# Altium PCB TH PCB.PcbDoc
Units mm, origin at the board's own origin, x right, y up, seen from the top; angles counter-clockwise.
Board outline 108.58 x 105.54 mm, 2 copper layers (Top Layer, Bottom Layer); 35 components, 24 nets, 87 pads, 0 vias.
Unrouted connection lines stored in the file: 28.
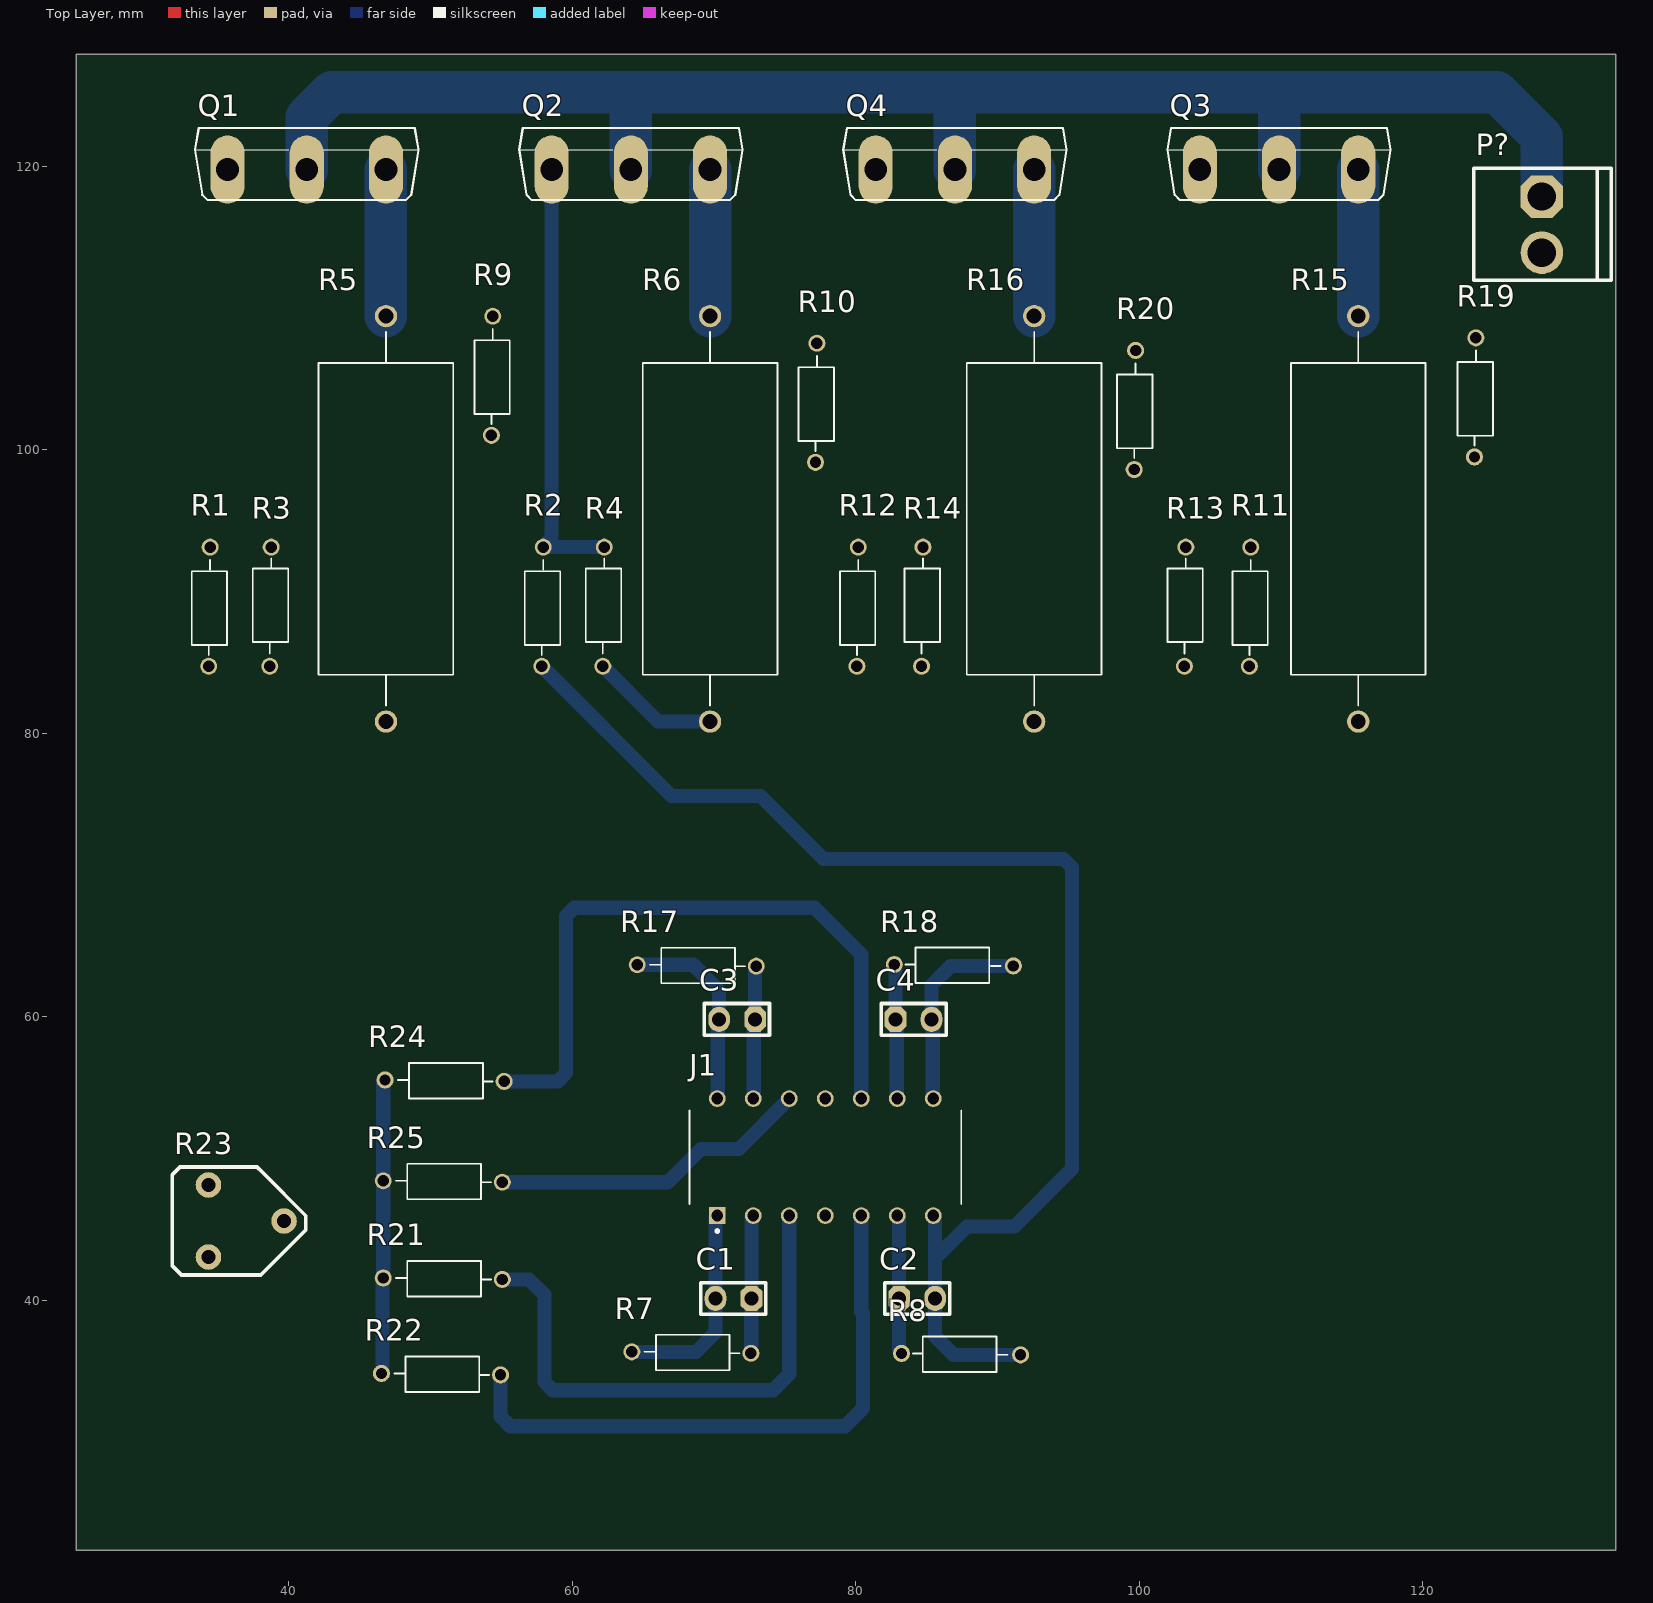
[diagram p0: Top Layer view]
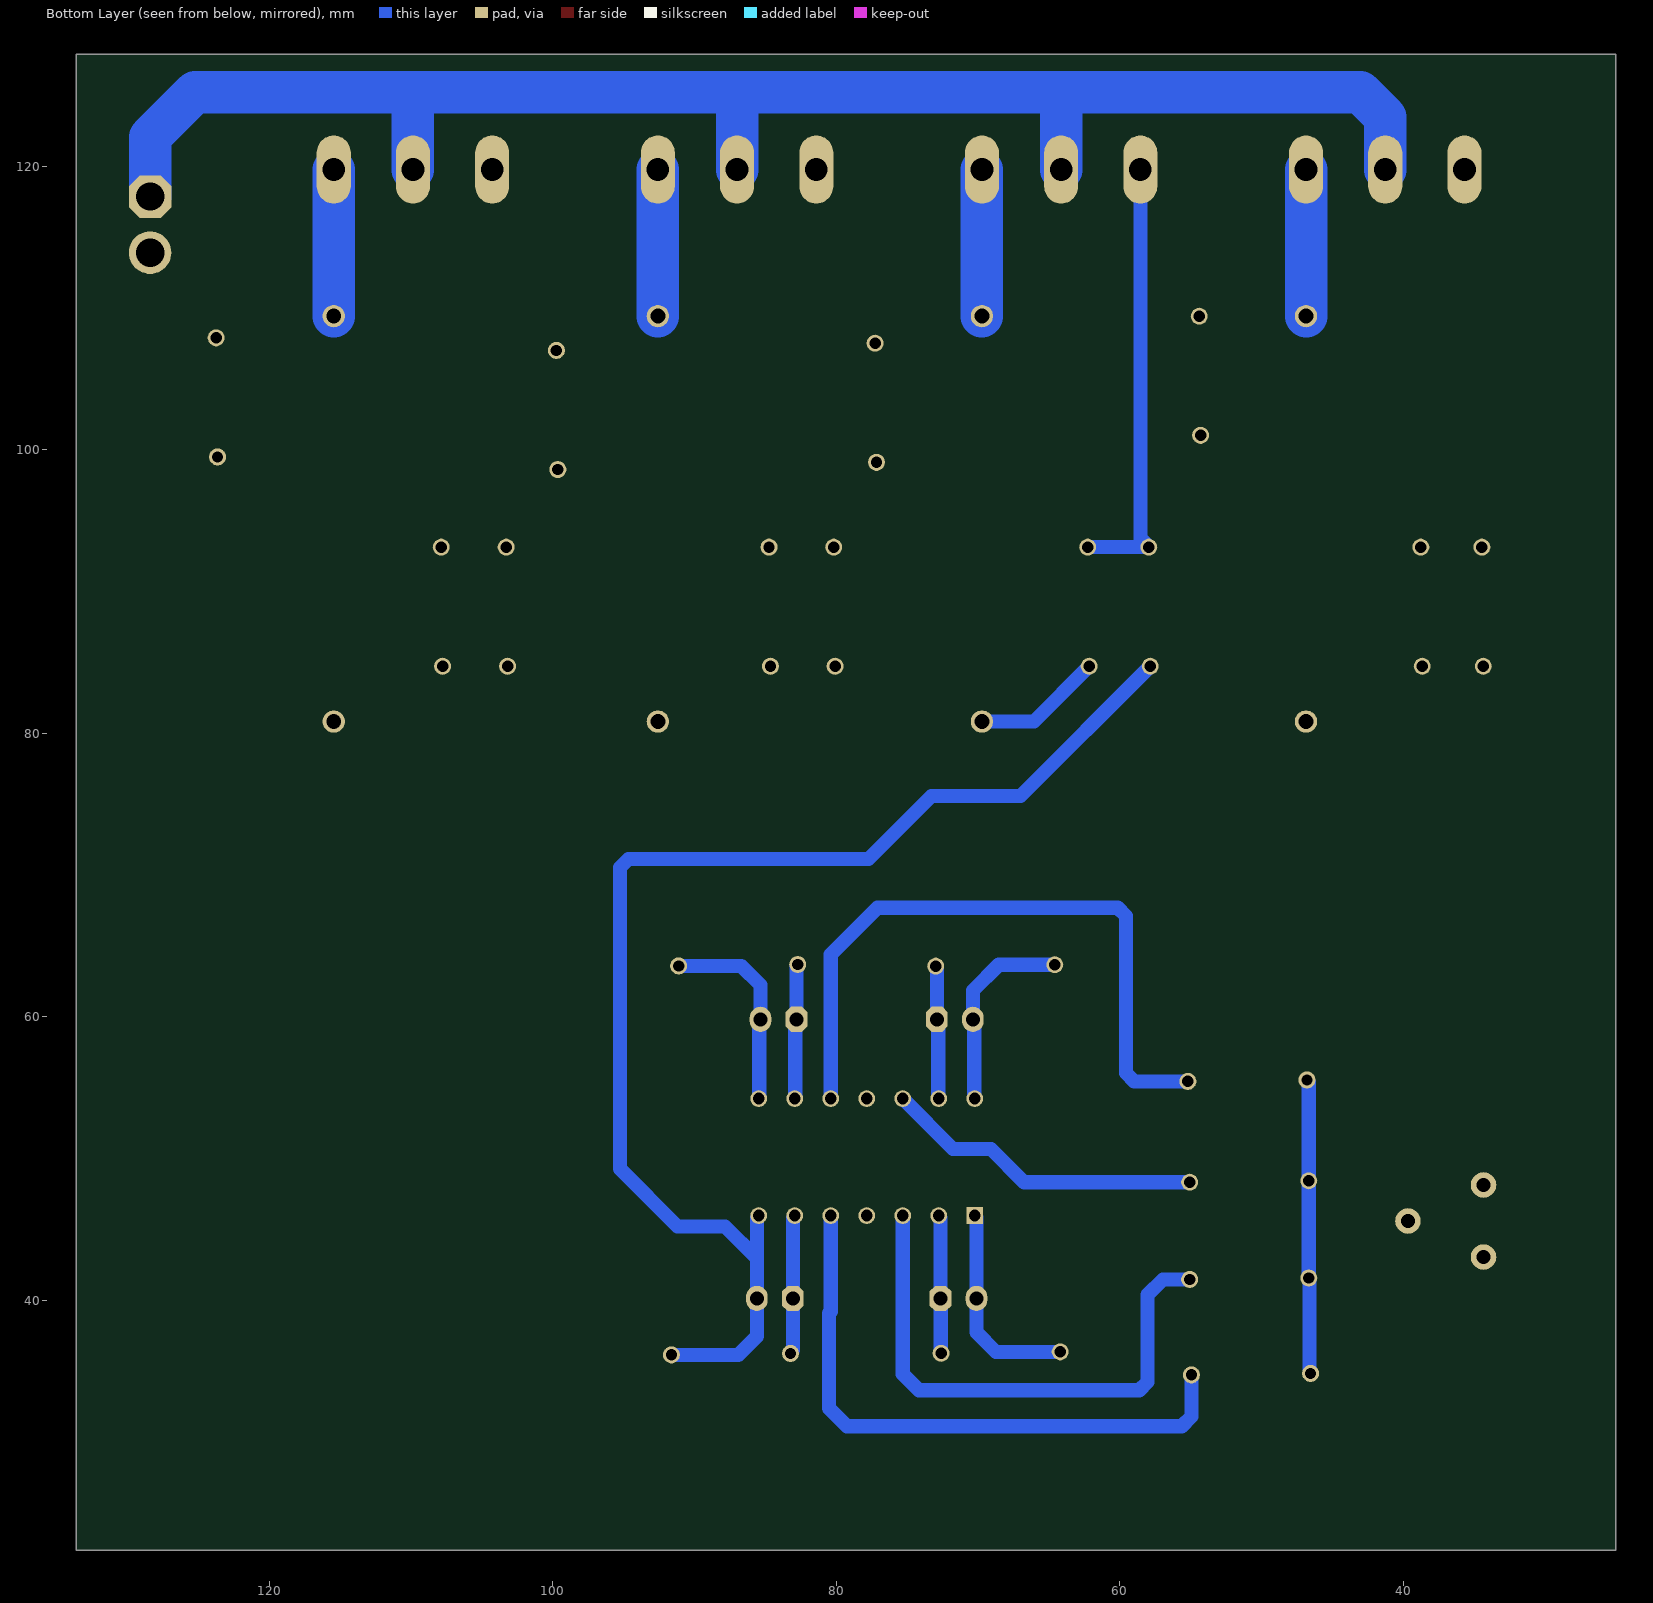
[diagram p1: Bottom Layer view, seen from below]
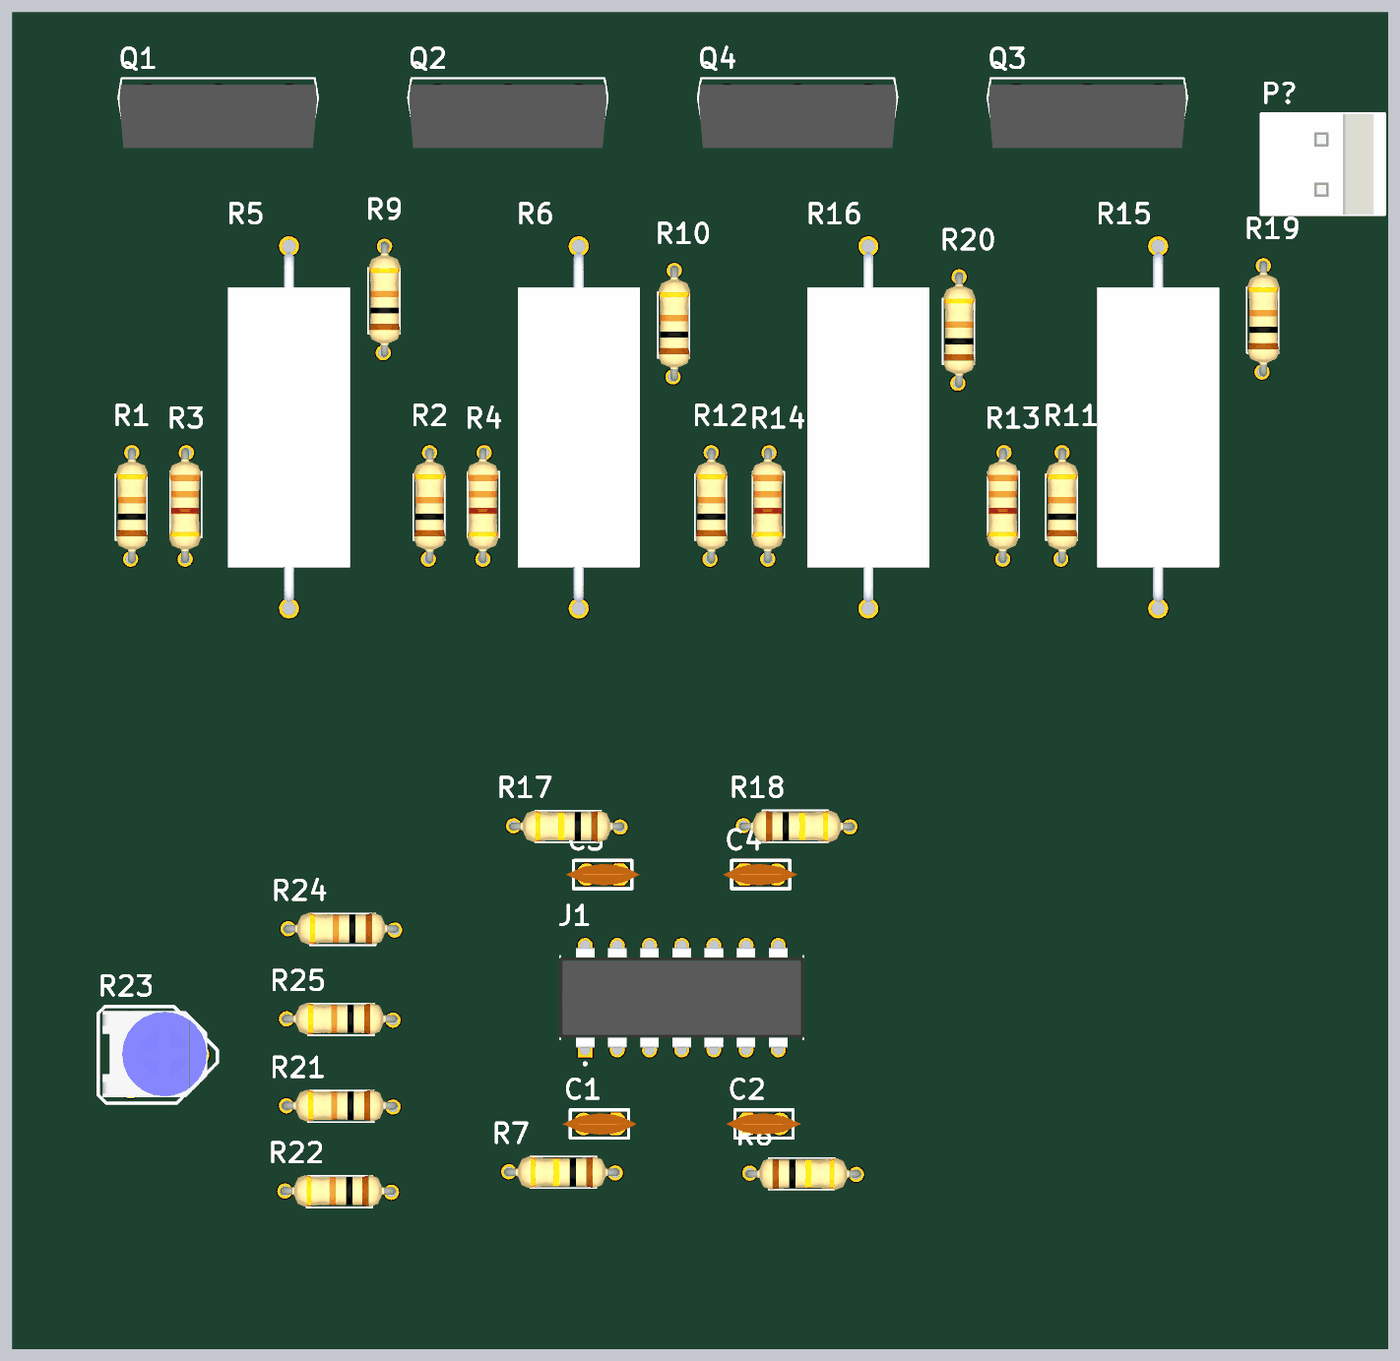
[diagram p2: 3D render of the assembled board from above, using the file's embedded part models]

## Layer stack, top to bottom
Top Solder: solder mask 0.0102, Solder Resist, Dk 3.5
Top Layer: signal copper 0.0356
Dielectric 1: dielectric 0.32, FR-4, Dk 4.8
Bottom Layer: signal copper 0.0356
Bottom Solder: solder mask 0.0102, Solder Resist, Dk 3.5

## Board outline
25.019,22.352 25.019,127.889 133.604,127.889 133.604,22.352

## Design rules (kind name [scope] priority, off if disabled: settings)
Clearance [All] p1: gap=0.254 ignorepadtopadclearanceinfootprint=FALSE except(0: Arc-Hole Track-Hole SMDPad-Hole THPad-Hole Via-Hole Fill-Hole Poly-Hole Region-Hole Text-Hole)
Height [All] p1: minheight=0 maxheight=50 prefheight=12.7
PolygonConnect [All] p1: connectstyle=Relief reliefconductorwidth=0.254 reliefentries=4 polygonreliefangle="90 Angle" airgapwidth=0.254
RoutingVias [All] p1: holewidth=0.711 width=1.27 viastyle="Through Hole" minholewidth=0.711 minwidth=1.27 maxholewidth=0.711 maxwidth=1.27
SolderMaskExpansion [All] p1: expansion=0.102 istentingtop=FALSE
Width [All] p1: maxlimit=10 minlimit=0.2 preferedwidth=3 toplayer_minwidth=0.254 toplayer_maxwidth=0.254 toplayer_prefwidth=0.254 minimp=50.000000 maximp=50.000000 favimp=50.000000
29 further rules are at their usual default settings.

## Components (designator, comment, footprint, x,y, rotation, side; value= is the part's Value field where it differs from the comment)
C1 "1nF" My_cap100n 71.374,40.132 r180 top
C2 "1nF" My_cap100n 84.328,40.132 r0 top
C3 "1nF" My_cap100n 71.628,59.817 r180 top
C4 "1nF" My_cap100n 84.074,59.817 r0 top
J1 "LM324N/NOPB" DIP825W47P254L1917H533Q14 77.851,50.102 r90 top
P? "Header 2" "My_ Power_Connector" 127.397,115.876 r270 top
Q1 "IRFP150" TO247BV 41.275,122.682 r0 top
Q2 "IRFP150" TO247BV 64.135,122.682 r0 top
Q3 "IRFP150" TO247BV 109.855,122.682 r0 top
Q4 "IRFP150" TO247BV 86.995,122.682 r0 top
R1 "1K" R10K_10mm_TH_my 34.417,88.74 r90 top
R2 "1K" R10K_10mm_TH_my 57.912,88.74 r90 top
R3 "4.7K" R3.3k_10mm_TH_my 38.608,89.408 r270 top
R4 "4.7K" R3.3k_10mm_TH_my 62.103,89.408 r270 top
R5 "RES_5W" RES_5W 46.863,95.123 r270 top
R6 "RES_5W" RES_5W 69.723,95.123 r270 top
R7 "220K" R100K_10MM_Th 69.088,36.322 r180 top
R8 "220K" R100K_10MM_Th 86.741,36.195 r0 top
R9 "1K" R10K_10mm_TH_my 54.356,105.029 r90 top
R10 "1K" R10K_10mm_TH_my 77.216,103.124 r90 top
R11 "1K" R10K_10mm_TH_my 107.823,88.74 r90 top
R12 "1K" R10K_10mm_TH_my 80.137,88.74 r90 top
R13 "4.7K" R3.3k_10mm_TH_my 103.124,89.408 r270 top
R14 "4.7K" R3.3k_10mm_TH_my 84.582,89.408 r270 top
R15 "RES_5W" RES_5W 115.443,95.123 r270 top
R16 "RES_5W" RES_5W 92.583,95.123 r270 top
R17 "220K" R100K_10MM_Th 69.469,63.627 r180 top
R18 "220K" R100K_10MM_Th 86.233,63.627 r0 top
R19 "1K" R10K_10mm_TH_my 123.698,103.505 r90 top
R20 "1K" R10K_10mm_TH_my 99.695,102.616 r90 top
R21 "1K" R10K_10mm_TH_my 51.054,41.529 r180 top
R22 "1K" R10K_10mm_TH_my 50.927,34.798 r180 top
R23 "1K" MY_TRIM_POT 35.814,45.593 r0 top
R24 "1K" R10K_10mm_TH_my 51.181,55.499 r180 top
R25 "1K" R10K_10mm_TH_my 51.054,48.387 r180 top

## Footprints (in the part's own frame and the unit in brackets; to place one, negate y for a bottom-side part, rotate by r counter-clockwise, add the part's x,y. Pads: shape width x height; smd on the part's side, far side on the other; paste and mask are expansions set on the pad)
DIP825W47P254L1917H533Q14 [mm]
  rect 1.18x1.18 / inner round 1.18 / far side rect 1.18x1.18 hole 0.83 mask+0.102: 1(-4.128,7.62)
  round 1.18 hole 0.83 mask+0.102: 2(-4.127,5.08) 3(-4.127,2.54) 4(-4.127,0) 5(-4.127,-2.54) 6(-4.127,-5.08) 7(-4.127,-7.62) 8(4.128,-7.62) 9(4.127,-5.08) 10(4.127,-2.54) 11(4.127,0) 12(4.127,2.54) 13(4.127,5.08) 14(4.127,7.62)
  silkscreen extent -5.32,-9.59 3.3,9.59, body extent -3.94,-9.65 3.94,9.65, height 5.08
"My_ Power_Connector" [mm]
  oct 3x3 hole 2: 1(-1.98,1)
  round 3 hole 2: 2(1.98,1)
  silkscreen extent -3.99,-3.81 3.94,5.91, body extent -3.96,-3.68 3.96,5.92, height 13.9
My_cap100n [mil]
  oct 60x70 hole 39.37: 1(-50,0)
  oval 60x70 hole 39.37: 2(50,0)
  silkscreen extent -90,-44 91,44, body extent -115,-33 115,33, height 245
MY_TRIM_POT [mm]
  round 1.8 hole 1: 1(-1.473,2.54) 2(-1.473,-2.54) 3(3.861,0)
  silkscreen extent -4.01,-3.81 5.38,3.81, body extent -3.66,-3.35 4.59,3.46, height 7.64
R3.3k_10mm_TH_my [mm]
  round 1.2 hole 0.8: 1(-3.716,0.158) 2(4.684,0.058)
  silkscreen extent -2.92,-1.14 3.78,1.36, body extent -4.1,-1.2 5,1.3, height 2.65
R10K_10mm_TH_my [mm]
  round 1.2 hole 0.8: 1(-4.016,0.058) 2(4.384,-0.042)
  silkscreen extent -3.22,-1.24 3.48,1.26, body extent -4.35,-1.3 4.75,1.2, height 2.65
R100K_10MM_Th [mm]
  round 1.2 hole 0.8: 1(-3.516,0.058) 2(4.884,-0.042)
  silkscreen extent -2.72,-1.24 3.98,1.26, body extent -3.85,-1.25 5.25,1.25, height 2.65
RES_5W [mm]
  round 1.575 hole 1.05: 1(-14.3,0) 2(14.3,0)
  silkscreen extent -13.19,-4.75 13.19,4.75, body extent -13.8,-4.75 13.8,4.75, height 9
TO247BV [mm]
  oval 2.4x4.8 hole 1.6: D(0,-2.921) G(-5.588,-2.921) S(5.588,-2.921)
  silkscreen extent -7.87,-5.08 7.87,0, body extent -7.8,-5.51 7.8,-0.51, height 26.21

## Part data
C1 C2 C3 C4: library part "Cap ceramic", "None polar capacitor", ASiD Part Number=C-AS, Volte=50v
J1: "Quad 30-V 1.2-MHz operational amplifier", Package="PDIP-14 Texas Instruments", Check_prices=https://www.snapeda.com/parts/LM324N/Texas+Instruments/view-part/?ref=eda, MF="Texas Instruments", MP=LM324N, SnapEDA_Link=https://www.snapeda.com/parts/LM324N/Texas+Instruments/view-part/?ref=snap
P?: "Header, 2-Pin", ASiD Part Number="Header 2-AS"
Q1 Q2 Q3 Q4: "N-Channel 100V 41A _Tc_ 230W _Tc_ Through Hole TO-247-3", Package="TO-247 Vishay Siliconix", Availability=Unavailable, MF="Vishay Siliconix", MP=IRFP150, Price=None, SnapEDA_Link=https://www.snapeda.com/parts/IRFP150/Vishay%20Siliconix/view-part/2883493/?ref=snap
R1 R2 R3 R4 R7 R8 R9 R10 R11 R12 R13 R14 R17 R18 R19 R20 R21 R22 R24 R25: library part Res, "Standard resistor", ASiD Part Number=Res-AS
R5 R6 R15 R16: "27 Ohm ±5% 5W AÃ§Ä±k Delikli DirenÃ§ Eksenel Aleve DayanÄ±klÄ±, Darbeye DayanÄ±klÄ±, GÃ¼venlik Ã‡imento", Package=None, Check_prices=https://www.snapeda.com/parts/SQP500JB-27R/Yageo/view-part/?ref=eda, MF=Yageo, MP=SQP500JB-27R, SnapEDA_Link=https://www.snapeda.com/parts/SQP500JB-27R/Yageo/view-part/?ref=snap
R23: library part "Variable Resistor", "Potentiometer", ASiD Part Number="Variable Resistor-AS"

## Nets (pads, with @x,y where several pads share a name; then routed paths per layer and width w, separated by ;. In a path a pad name is that pad's centre, name@x,y a point inside that pad or via, vN(x,y) a via of type N, cw(c..) or ccw(c..) an arc to the next point about the centre after c; other vN are vias at no path point)
+12V: J1.4 R23.1
+LOAD: P?.1 Q1.D Q2.D Q3.D Q4.D | length 113.6
  Bottom Layer w3: Q1.D 41.275,123.465 43.032,125.222 64.135,125.222 ; Q2.D 64.135,125.222 ; Q4.D 86.995,124.968 86.741,125.222 ; Q3.D 109.855,125.095 109.728,125.222 ; P?.1 128.397,122.047 125.222,125.222 109.728,125.222 ; 64.135,125.222 86.741,125.222 ; 86.741,125.222 109.728,125.222
GND: J1.11 P?.2 R3.2 R4.2 R5.2 R6.2 R13.2 R14.2 R15.2 R16.2 R23.2 | length 9.2
  Bottom Layer w1: R4.2 66.062,80.823 R6.2
NetC1_1: C1.1 J1.2 R7.1 R9.1 | length 9.8
  Bottom Layer w1: R7.1 72.624,36.284 72.624,40.112 C1.1 72.644,45.798 72.771,45.925 J1.2
NetC1_2: C1.2 J1.1 R1.1 R7.2 | length 14.8
  Bottom Layer w1: R7.2 68.725,36.364 70.104,37.743 C1.2 70.104,45.847 J1.1
NetC2_1: C2.1 J1.6 R8.1 R10.1 | length 9.8
  Bottom Layer w1: J1.6 82.931,45.925 83.058,45.798 C2.1 83.058,36.474 83.225,36.307 R8.1
NetC2_2: C2.2 J1.7 R2.1 R8.2 | length 91.9
  Bottom Layer w1: R2.1 67.014,75.565 73.279,75.565 77.724,71.12 94.664,71.12 95.25,70.534 95.25,49.276 91.186,45.212 87.845,45.212 85.598,42.965 ; J1.7 85.471,45.925 85.598,45.798 85.598,42.965 ; R8.2 86.91,36.153 85.598,37.465 C2.2 85.598,42.965
NetC3_1: C3.1 J1.13 R17.1 R19.1 | length 9.4
  Bottom Layer w1: J1.13 72.805,54.263 72.805,59.724 C3.1 72.898,63.428 72.985,63.515 R17.1
NetC3_2: C3.2 J1.14 R11.1 R17.2 | length 14.2
  Bottom Layer w1: R17.2 68.538,63.669 70.358,61.849 C3.2 70.265,59.724 70.265,54.263 J1.14
NetC4_1: C4.1 J1.9 R18.1 R20.1 | length 9.5
  Bottom Layer w1: R18.1 82.717,63.63 82.804,63.543 C4.1 82.897,59.724 82.897,54.263 J1.9
NetC4_2: C4.2 J1.8 R12.1 R18.2 | length 14.4
  Bottom Layer w1: J1.8 85.437,54.263 85.437,59.724 C4.2 85.344,62.23 86.699,63.585 R18.2
NetQ1_G: Q1.G R1.2 R3.1
NetQ1_S: Q1.S R5.1 R9.2 | length 10.3
  Bottom Layer w3: R5.1 Q1.S
NetQ2_G: Q2.G R2.2 R4.1 | length 31.2
  Bottom Layer w1: Q2.G 58.547,93.771 57.954,93.178 R2.2 R4.1
NetQ2_S: Q2.S R6.1 R10.2 | length 10.3
  Bottom Layer w3: R6.1 Q2.S
NetQ3_G: Q3.G R11.2 R13.1
NetQ3_S: Q3.S R15.1 R19.2 | length 10.3
  Bottom Layer w3: R15.1 Q3.S
NetQ4_G: Q4.G R12.2 R14.1
NetQ4_S: Q4.S R16.1 R20.2 | length 10.3
  Bottom Layer w3: R16.1 Q4.S
NetR21_2: R21.2 R22.2 R23.3 R24.2 R25.2 | length 20.7
  Bottom Layer w1: R22.2 46.581,34.879 46.581,35.147 46.609,35.174 46.609,41.369 46.632,41.392 46.632,41.488 R21.2@46.609,41.51 ; R21.2 46.67,55.36 46.797,55.487 R24.2
PIN3: J1.3 R21.1 | length 38.7
  Bottom Layer w1: R21.1 56.954,41.471 58.039,40.386 58.039,34.241 58.625,33.655 74.168,33.655 75.311,34.798 J1.3
PIN5: J1.5 R22.1 | length 43
  Bottom Layer w1: R22.1 54.943,31.798 55.626,31.115 79.248,31.115 80.518,32.385 80.518,39.092 80.391,39.219 J1.5
PIN10: J1.10 R24.1 | length 48.3
  Bottom Layer w1: R24.1 58.977,55.441 59.563,56.027 59.563,67.105 60.149,67.691 77.089,67.691 80.391,64.389 J1.10
PIN12: J1.12 R25.1 | length 22.7
  Bottom Layer w1: R25.1 66.744,48.329 69.088,50.673 71.755,50.673 J1.12

## Silkscreen, mask and mechanical layers (free items; w line width, h text height)
Mechanical 1:
  the board outline again, w0.254

## Dimensions
25.019,22.352 to 133.604,22.352 on Mechanical 1
133.604,127.889 to 133.604,22.352 on Mechanical 1